# EAGLE board PCB (EAGLE 9.7.0)
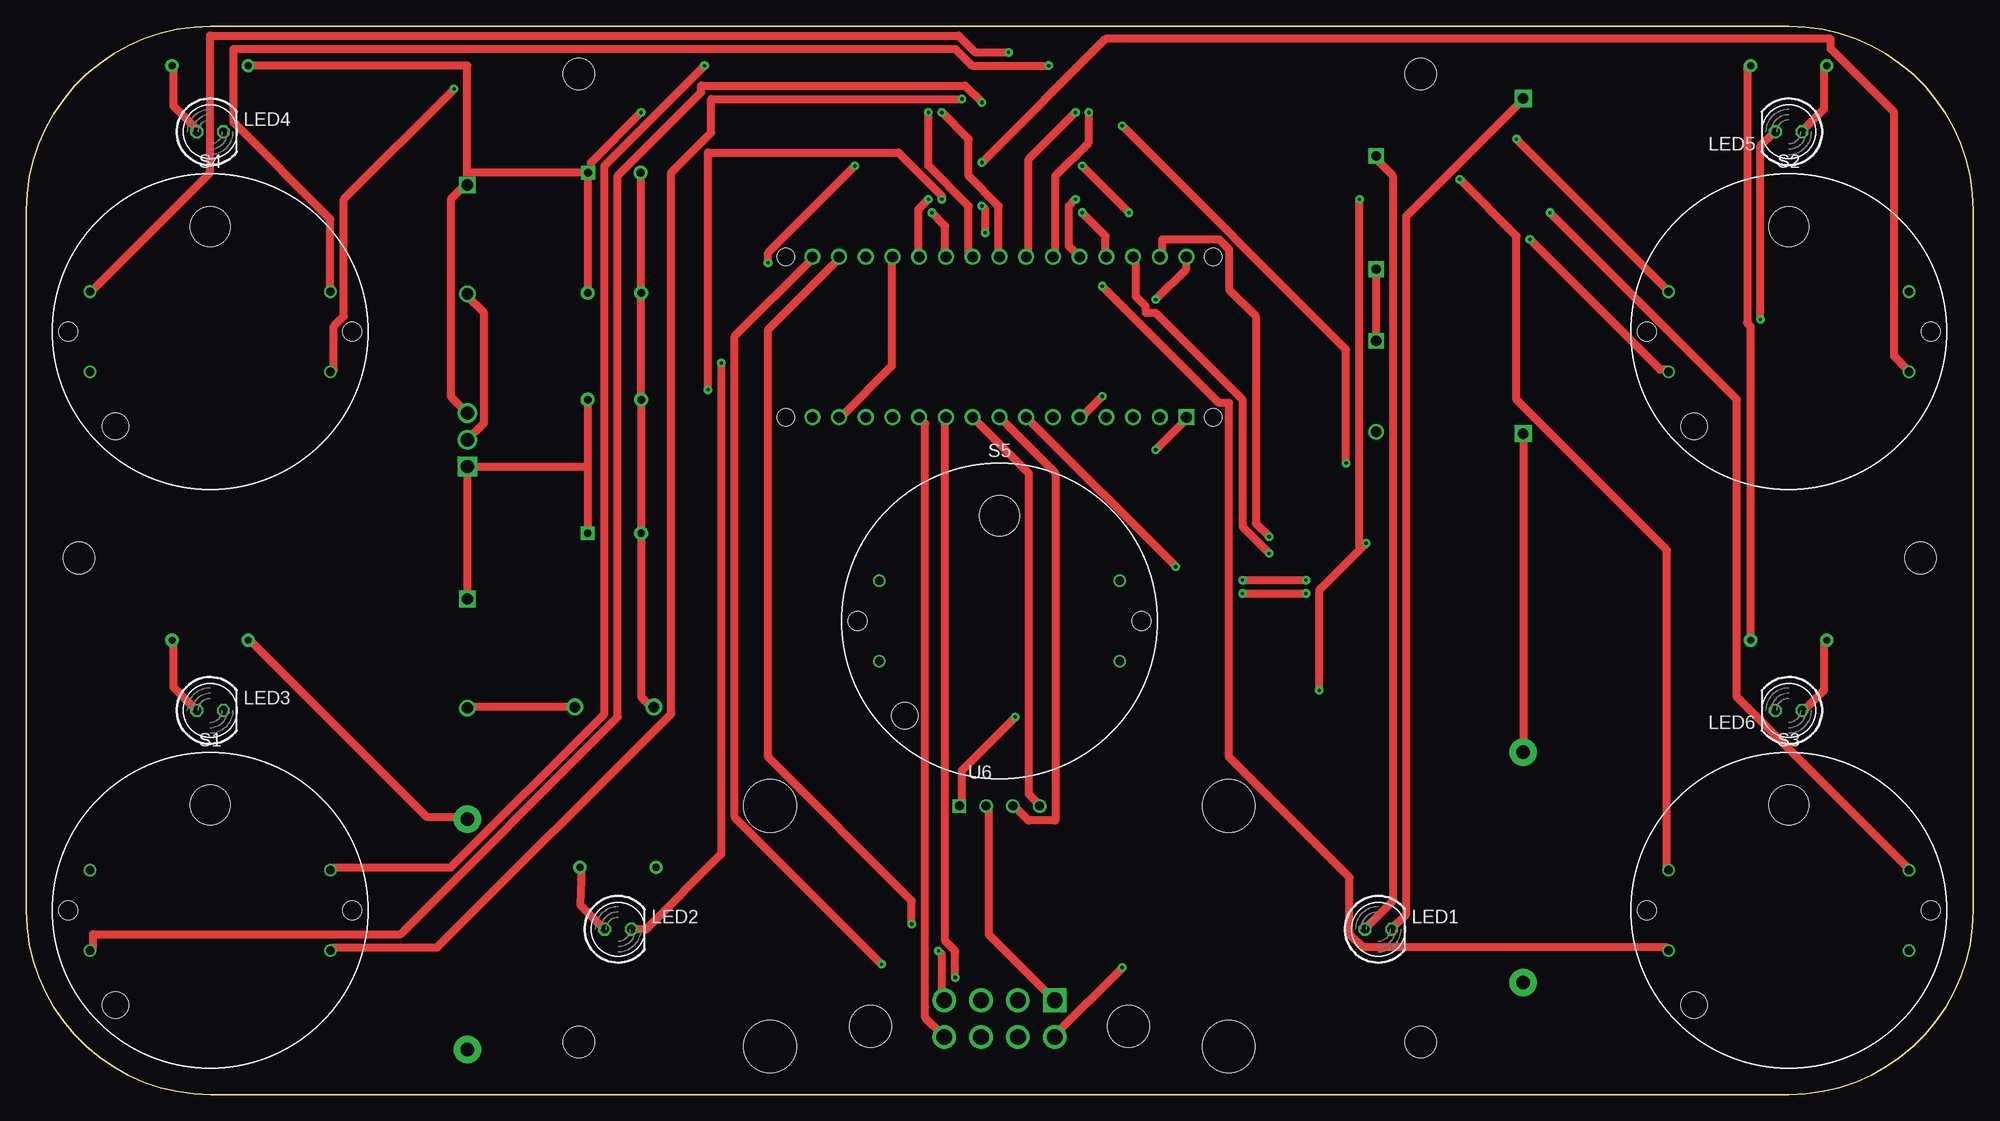
[diagram p0: board, top side]
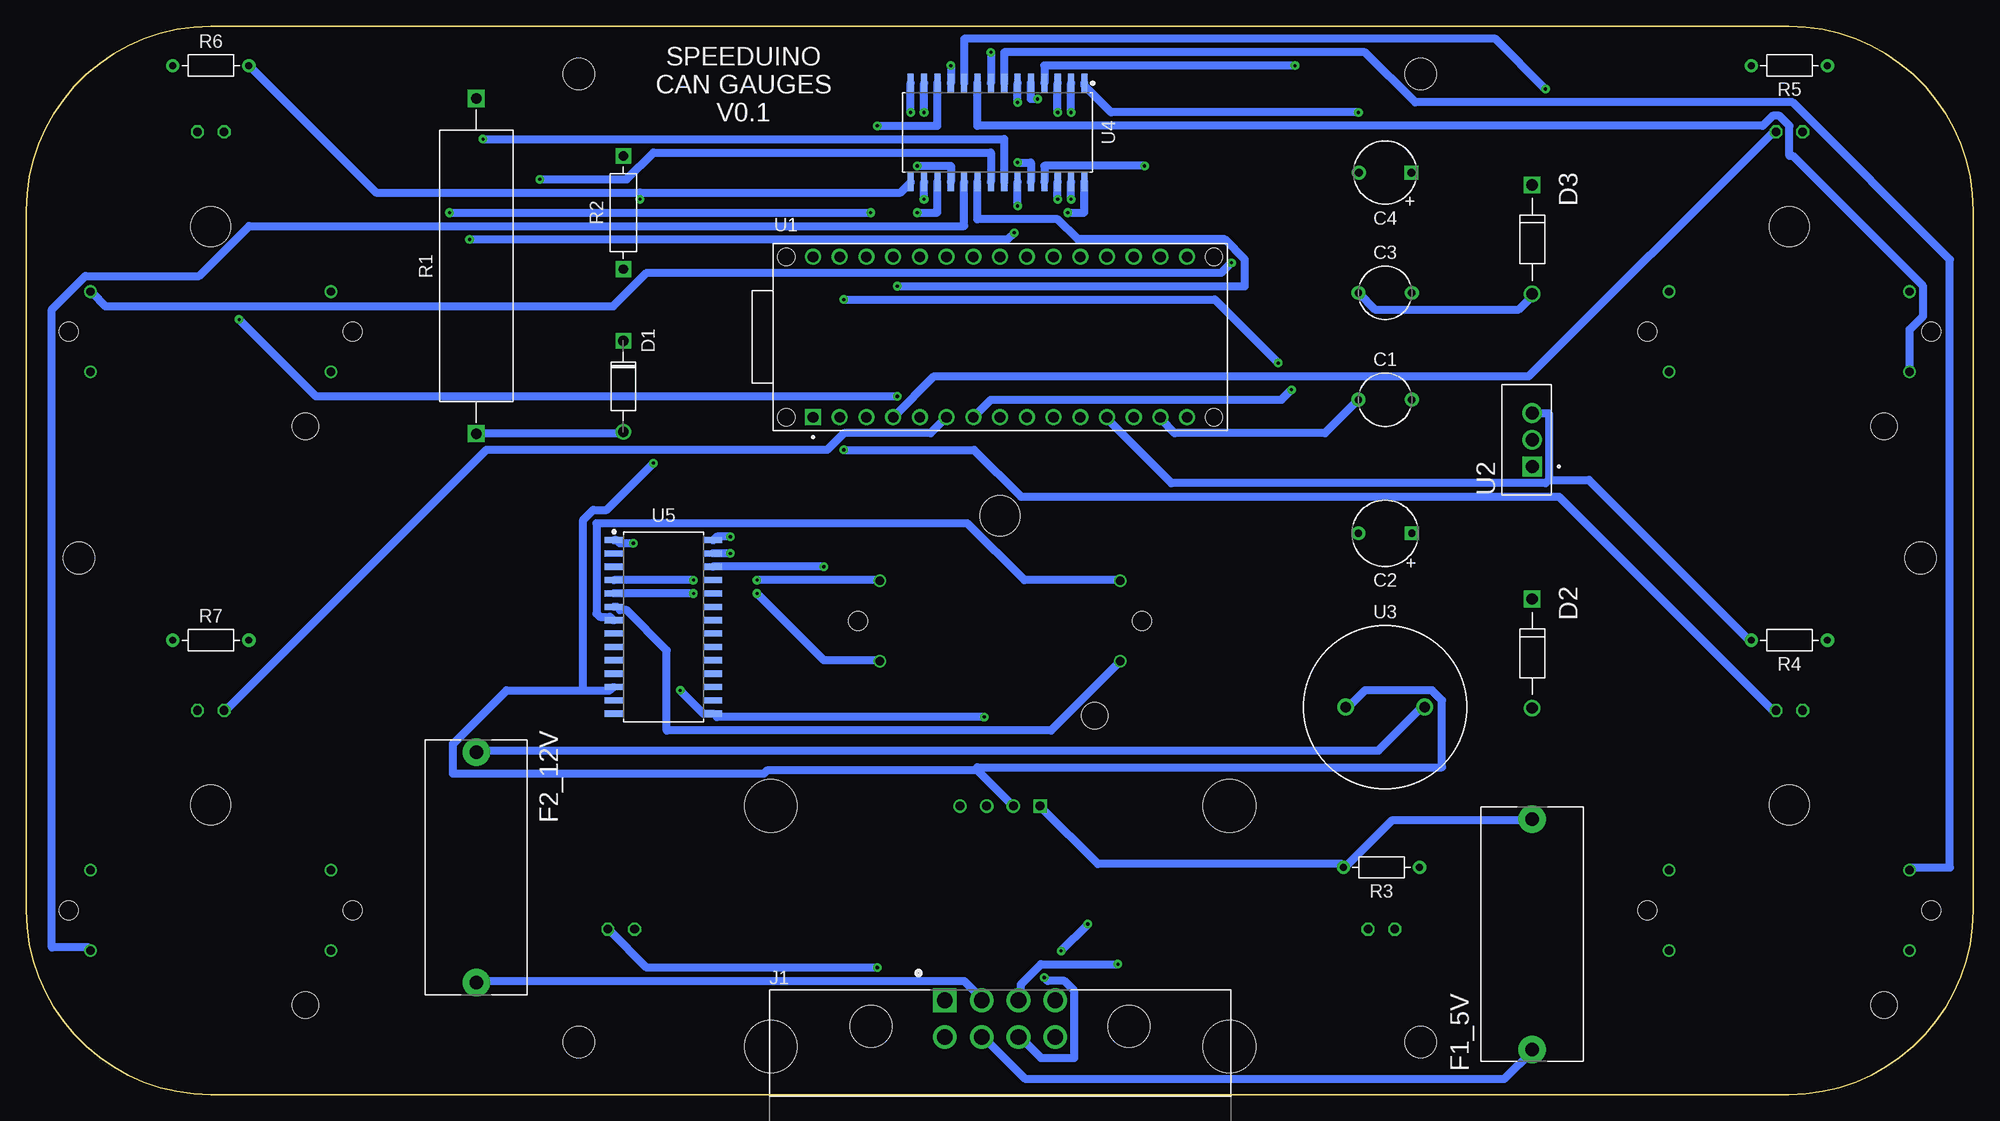
[diagram p1: board, bottom side, seen from below]

Size 185 x 101.53 mm. Coordinates in mm from the lower left corner, seen from the top.
Outline: 167.5,101.53 17.5,101.53 arc90 0,84.03 0,17.5 arc90 17.5,0 167.5,0 arc90 185,17.5 185,84.03 arc90 167.5,101.53
Copper layers (1*16): Top 0.035559375mm / dielectric 1.6mm / Bottom 0.035559375mm
Design rules "jlcpcb2layer *": minimum track width 30mil, minimum drill 12mil, track to track 10mil, track to pad 10mil, pad to pad 5mil, via to via 10mil, smd to smd 5mil, copper to edge 8mil, drill to drill 6mil, minimum pad ring 5mil, minimum via ring 10mil, stop-mask expansion 2.5mil, vias tented up to drill 0mil, thermal gap 10mil
Holes 3 mm at 180,51 5,51 132.5,5 52.5,5 132.5,97 52.5,97

## Footprints (pad centres in the part's own frame; a part is rotated, then mirrored left to right if it is on the bottom)
C322C104K5R5TA = drill 0.71 pad 1.31: 1 -2.54,0; 2 2.54,0
T356G106K035AT = drill 0.7 pad 1.3 square: 1 -2.54,0 | drill 0.7 pad 1.3: 2 2.54,0
TAP476K006CCS = drill 0.75 pad 1.35 square: 1 -2.5,0 | drill 0.75 pad 1.35: 2 2.5,0
DO-41 = drill 1: A 4.325,0 | drill 1 square: C -4.325,0
DIOAD1036W78L520D271 = drill 1.06: A 5.18,0 | drill 1.06 square: K -5.18,0
4527 = drill 1.3 pad 2.6: 1 -10.95,0; 2 10.95,0
MOLEX_34830-0801 = drill 1.5 square: 1 -5.25,2.46 | drill 1.5: 2 -1.75,2.46; 3 1.75,2.46; 4 5.25,2.46; 5 -5.25,-1.04; 6 -1.75,-1.04; 7 1.75,-1.04; 8 5.25,-1.04 | hole 4: -12.25,0; 12.25,0
LED5MM = drill 0.813 octagon: A -1.27,0; K 1.27,0
25J50RE = drill 1.02 pad 1.62 square: 1 -15.93,0; 2 15.93,0
CMF55 = drill 0.89 pad 1.49 square: 1 -5.375,0; 2 5.375,0
RESAD724W46L381D178B = drill 0.66 pad 1.26: 1 -3.62,0; 2 3.62,0
X27.168 = drill 0.8: P$1 -11.43,3.81; P$2 -11.43,-3.81; P$3 11.43,3.81; P$4 11.43,-3.81 | hole 3.8: 0,10 | hole 1.8: -13.5,0; 13.5,0 | hole 2.5: -9,-9
MODULE_ABX00053 = drill 1.016 square: 1 -17.78,-7.62 | drill 1.016: 2 -15.24,-7.62; 3 -12.7,-7.62; 4 -10.16,-7.62; 5 -7.62,-7.62; 6 -5.08,-7.62; 7 -2.54,-7.62; 8 0,-7.62; 9 2.54,-7.62; 10 5.08,-7.62; 11 7.62,-7.62; 12 10.16,-7.62; 13 12.7,-7.62; 14 15.24,-7.62; 15 17.78,-7.62; 16 17.78,7.62; 17 15.24,7.62; 18 12.7,7.62; 19 10.16,7.62; 20 7.62,7.62; 21 5.08,7.62; 22 2.54,7.62; 23 0,7.62; 24 -2.54,7.62; 25 -5.08,7.62; 26 -7.62,7.62; 27 -10.16,7.62; 28 -12.7,7.62; 29 -15.24,7.62; 30 -17.78,7.62 | hole 1.65: -20.32,-7.62; -20.32,7.62; 20.32,7.62; 20.32,-7.62
TO254P1054X470X1955-3 = drill 1.24 square: 1 -2.54,0 | drill 1.24: 2 0,0; 3 2.54,0
ERZV14D220 = drill 1 pad 1.6: 1 -3.75,0; 2 3.75,0
AX1201728SG = smd 1.754 x 0.585: 1 -4.691,8.255; 2 -4.691,6.985; 3 -4.691,5.715; 4 -4.691,4.445; 5 -4.691,3.175; 6 -4.691,1.905; 7 -4.691,0.635; 8 -4.691,-0.635; 9 -4.691,-1.905; 10 -4.691,-3.175; 11 -4.691,-4.445; 12 -4.691,-5.715; 13 -4.691,-6.985; 14 -4.691,-8.255; 15 4.691,-8.255; 16 4.691,-6.985; 17 4.691,-5.715; 18 4.691,-4.445; 19 4.691,-3.175; 20 4.691,-1.905; 21 4.691,-0.635; 22 4.691,0.635; 23 4.691,1.905; 24 4.691,3.175; 25 4.691,4.445; 26 4.691,5.715; 27 4.691,6.985; 28 4.691,8.255
0.56"7-SEGMENTBACKPACK = drill 0.85: P$1 3.81,0; P$2 1.27,0; P$3 -1.27,0 | drill 0.85 square: P$4 -3.81,0 | hole 5: 21.798,0; -21.798,0; -21.798,-22.86; 21.798,-22.86

## Placement (x,y rotation side)
C1  0.1uF 50V  [C322C104K5R5TA]  55.88,66.04 0 bottom
C2  10uF 35V  [T356G106K035AT]  55.88,53.34 180 bottom
C3  0.1uF 50V  [C322C104K5R5TA]  55.88,76.2 0 bottom
C4  47uF 10V  [TAP476K006CCS]  55.88,87.63 180 bottom
D1  [DO-41]  128.27,67.31 270 bottom
D2  1N5818  [DIOAD1036W78L520D271]  41.91,41.91 270 bottom
D3  1N5919  [DIOAD1036W78L520D271]  41.91,81.28 270 bottom
F1_5V  4527  [4527]  41.91,15.24 90 bottom
F2_12V  4527  [4527]  142.24,21.59 270 bottom
J1  34830-0801  [MOLEX_34830-0801]  92.47,6.5 0 bottom
LED1  BATT  [LED5MM]  128.47,15.71 0 top
LED2  RPM  [LED5MM]  56.23,15.71 0 top
LED3  CLT  [LED5MM]  17.47,36.51 0 top
LED4  OIL  [LED5MM]  17.47,91.5 0 top
LED5  AFR  [LED5MM]  167.47,91.5 180 top
LED6  FUEL  [LED5MM]  167.47,36.51 180 top
R1  50Ω 5W  [25J50RE]  142.24,78.74 90 bottom
R2  500Ω 0.5W  [CMF55]  128.27,83.82 90 bottom
R3  220Ω  [RESAD724W46L381D178B]  56.23,21.59 180 bottom
R4  220Ω  [RESAD724W46L381D178B]  17.47,43.18 180 bottom
R5  220Ω  [RESAD724W46L381D178B]  17.47,97.79 180 bottom
R6  220Ω  [RESAD724W46L381D178B]  167.47,97.79 0 bottom
R7  220Ω  [RESAD724W46L381D178B]  167.47,43.18 0 bottom
S1  CLT  [X27.168]  17.47,17.51 0 top
S2  AFR  [X27.168]  167.47,72.5 0 top
S3  FUEL  [X27.168]  167.47,17.51 0 top
S4  OIL  [X27.168]  17.47,72.5 0 top
S5  TACH  [X27.168]  92.47,45.01 0 top
U1  NANO  [MODULE_ABX00053]  92.47,72 0 bottom
U2  LM2940T-5.0  [TO254P1054X470X1955-3]  41.91,62.23 90 bottom
U3  ERZV14D220  [ERZV14D220]  55.88,36.83 0 bottom
U4  AX1201728SG  [AX1201728SG]  92.71,91.44 270 bottom
U5  AX1201728SG  [AX1201728SG]  124.46,44.45 0 bottom
U6  0.56"7-SEGMENTBACKPACK  [0.56"7-SEGMENTBACKPACK]  92.47,27.43 0 top

## Library data of the parts
C1-C4 R1 R2 S1-S5 U3-U6 = GaugesPCB
D1 = Diodes; CREATED_BY: PCBLayout.com; DIGIKEY_PART_NUMBER: 1N4004MSCT-ND; MANUFACTURER: Micro Commercial Co; MPN: 1N4004; PACKAGE: DO-41
D2 D3 = 1N5818; AVAILABILITY: In Stock; DESCRIPTION: Diode Schottky 30 V 1A Through Hole DO-41; MF: STMicroelectronics; MP: 1N5818; PACKAGE: DO-41 STMicroelectronics; PRICE: None; PURCHASE-URL: https://pricing.snapeda.com/search/part/1N5818/?ref=eda
F1_5V F2_12V = Fuse Holder; CREATED_BY: PCBLayout.com; DIGIKEY_PN: 36-4527-ND; MANUFACTURER: Keystone Electronics; MPN: 4527
J1 = 34830-0801; AVAILABILITY: In Stock; DESCRIPTION: Connector Header Through Hole, Right Angle 8 position 0.138 (3.50mm); MF: Molex; MP: 34830-0801; PACKAGE: None; PRICE: None; PURCHASE-URL: https://pricing.snapeda.com/search/part/34830-0801/?ref=eda
LED1-LED6 = led
R3-R7 = Resistor; CATEGORY: Resistor; SUB-CATEGORY: Fixed
U1 = Arduino Nano; AVAILABILITY: In Stock; DESCRIPTION: NINA-W102, RP2040 Arduino Nano RP2040 Connect with Headers series ARM® Cortex®-M0+ MCU 32-Bit Embedded Evaluation Board; MF: Arduino; MP: ABX00053; PACKAGE: None; PRICE: None; PURCHASE-URL: https://pricing.snapeda.com/search/part/ABX00053/?ref=eda
U2 = LM2940T-5.0; AVAILABILITY: In Stock; DESCRIPTION: 1-A, 26-V, high-PSRR, low-dropout voltage regulator 3-TO-220 -40 to 125; MF: Texas Instruments; MP: LM2940T-5.0; PACKAGE: TO-220-3 Texas Instruments; PRICE: None; PURCHASE-URL: https://pricing.snapeda.com/search/part/LM2940T-5.0/?ref=eda

## Nets
+3V3: U1.2
+5V: C3.2 C4.1 D3.K F1_5V.2 R3.2 R4.2 R5.2 R6.2 R7.2 U1.12 U2.3 U4.1 U4.15 U5.1 U5.15 U6.P$4
+12V: D1.A D2.A F2_12V.1 R1.1 U3.2
GND: C1.1 C2.2 C3.1 C4.2 D3.A J1.1 U1.14 U1.19 U2.2 U3.1 U4.12 U5.12 U6.P$3
N$1: J1.3 U1.16
N$2: J1.4 U1.17
N$3: J1.7 U1.10
N$4: J1.8 U1.11
N$5: D1.C R2.1
N$6: LED1.A R2.2
N$7: J1.5 LED1.K R1.2
N$8: C1.2 C2.1 D2.K U2.1
N$9: F1_5V.1 J1.6
N$10: F2_12V.2 J1.2
N$11: U1.7 U4.26 U5.26
N$12: U1.20 U4.27
N$13: U1.21 U4.28
N$14: U1.22 U4.2
N$15: U1.23 U4.3
N$16: U1.24 U4.13
N$17: U1.25 U4.14
N$18: U1.26 U4.16
N$19: U1.27 U4.17
N$20: U1.28 U5.27
N$21: U1.29 U5.28
N$22: LED2.A R3.1
N$23: LED3.A R4.1
N$24: LED4.A R5.1
N$25: LED5.A R6.1
N$26: LED6.A R7.1
N$27: LED2.K U1.30
N$28: LED3.K U1.1
N$29: LED4.K U1.4
N$30: LED5.K U1.5
N$31: LED6.K U1.6
N$32: S1.P$1 U4.7
N$33: S1.P$2 U4.6
N$34: S1.P$3 U4.4
N$35: S1.P$4 U4.5
N$36: S5.P$1 U5.7
N$37: S5.P$2 U5.6
N$38: S5.P$3 U5.4
N$39: S5.P$4 U5.5
N$40: S4.P$1 U4.8
N$41: S4.P$2 U4.9
N$42: S4.P$3 U4.11
N$43: S4.P$4 U4.10
N$44: S3.P$3 U4.18
N$45: S3.P$4 U4.19
N$46: S3.P$2 U4.20
N$47: S3.P$1 U4.21
N$48: S2.P$1 U4.22
N$49: S2.P$2 U4.23
N$50: S2.P$4 U4.24
N$51: S2.P$3 U4.25
N$52: U1.8 U6.P$2
N$53: U1.9 U6.P$1
VIN: U1.15

## Tracks (layer width: path | path; a pad name or v marks a point on that pad's centre or on a via)
+5V  (via drill 0.3)
  Top 0.762: R7.2 163.83,43.18 163.83,73.03 163.51,73.34 163.51,97.47 163.83,97.79 R6.2 | v93.98,35.88 88.9,30.8 88.9,27.62 U6.P$4 | 126.84,51.91 122.87,47.94 v122.87,38.42 | 126.84,51.91 v127.32,52.39 | R4.2 21.27,43.18 38.1,26.35 41.91,26.35 F1_5V.2 | R5.2 41.91,97.79 41.91,87.63 | 41.91,87.63 D3.K 41.59,86.36 40.32,85.09 40.32,66.36 U2.3 | v58.42,93.34 53.66,88.58 53.66,87.63 C4.1 | C3.2 53.34,87.31 C4.1 | C4.1 41.91,87.63 | v126.68,85.09 126.68,52.07 126.84,51.91
  Bottom 0.762: 126.68,85.72 151.76,85.72 163.83,97.79 R6.2 | 126.68,85.72 101.92,85.72 100.97,86.68 U4.15 | v93.98,35.88 119.38,35.88 119.7,36.2 U5.15 120.65,36.2 v122.87,38.42 | v127.32,52.39 128.59,52.39 128.91,52.7 U5.1 | F1_5V.2 41.91,26.04 55.24,26.04 59.69,21.59 R3.2 60.01,21.91 83.19,21.91 88.58,27.3 U6.P$4 | 40.32,58.42 40.64,58.1 76.2,58.1 82.23,64.14 U1.12 | 40.32,58.42 40.32,64.77 U2.3 | v58.42,93.34 81.92,93.34 84.45,95.89 U4.1 | 40.32,58.42 36.51,58.42 21.27,43.18 R4.2 | v126.68,85.09 126.68,85.72
+12V
  Top 0.762: U3.2 41.91,36.83 D2.A | R1.1 F2_12V.1
  Bottom 0.762: D1.A 128.27,62.87 142.24,62.87 R1.1 | U3.2 52.39,36.83 56.52,32.7 142.24,32.7 F2_12V.1
GND  (via drill 0.3)
  Top 0.762: U1.14 77.47,64.45 82.23,69.22 82.23,79.38 U1.19 | U2.2 43.5,63.82 43.5,74.3 41.91,75.88 D3.A | C4.2 58.42,87.63 C3.1 C1.1 C2.2 58.42,37.78 59.37,36.83 U3.1 | v104.14,92.08 125.41,70.8 v125.41,60.01 | J1.1 91.44,15.24 91.44,27.3 U6.P$3
  Bottom 0.762: C3.1 56.83,74.61 43.18,74.61 41.91,75.88 D3.A | C1.1 61.59,62.87 75.88,62.87 77.15,64.14 U1.14 | 132.08,38.42 139.38,38.42 144.46,33.34 144.46,30.48 114.94,30.48 114.62,30.8 94.61,30.8 | 132.08,38.42 129.54,38.42 129.22,38.73 U5.12 | 94.61,30.8 91.44,27.62 U6.P$3 | U4.12 98.42,92.08 v104.14,92.08 | v125.41,60.01 129.86,55.56 131.13,55.56 132.08,54.61 132.08,38.42 | U3.1 59.37,36.83 57.78,38.42 51.44,38.42 50.48,37.47 50.48,31.11 94.61,31.11 94.61,30.8
N$1  (via drill 0.3)
  Top 0.762: v81.28,12.38 67.31,26.35 67.31,72.07 74.61,79.38 U1.16
  Bottom 0.762: v81.28,12.38 88.58,12.38 90.49,10.48 90.49,9.21 J1.3
N$2  (via drill 0.3)
  Top 0.762: v84.14,16.19 84.14,18.41 70.48,32.07 70.48,72.71 77.15,79.38 U1.17 | v86.68,13.65 87,13.34 87,9.21 J1.4
  Bottom 0.762: v86.68,13.65 v84.14,16.19
N$3  (via drill 0.3)
  Top 0.762: v88.27,11.11 88.27,13.65 87.31,14.61 87.31,64.14 U1.10
  Bottom 0.762: v88.27,11.11 87.95,10.79 86.36,10.79 85.41,9.84 85.41,3.49 88.58,3.49 90.49,5.4 J1.7
N$4
  Top 0.762: U1.11 85.09,64.14 85.41,63.82 85.41,7.3 87,5.71 J1.8
N$5
  Top 0.762: D1.C R2.1
N$6
  Top 0.762: LED1.A 127.32,15.88 129.86,18.41 129.86,87.31 128.27,88.9 R2.2
N$7  (via drill 0.3)
  Top 0.762: v104.14,12.06 97.79,5.71 J1.5 | R1.2 142.24,94.61 131.13,83.5 131.13,17.14 129.86,15.88 LED1.K
  Bottom 0.762: v104.14,12.06 126.05,12.06 129.54,15.56 LED1.K
N$8
  Top 0.762: C1.2 53.34,59.69 | 53.34,59.69 C2.1 | D2.K U2.1 53.34,59.69
N$9
  Bottom 0.762: J1.6 93.98,5.4 90.04,1.46 44.58,1.46 41.91,4.13 F1_5V.1
N$10
  Bottom 0.762: J1.2 94.3,9.21 95.89,10.79 142.24,10.79 F2_12V.2
N$11  (via drill 0.3)
  Top 0.762: v109.22,50.16 95.25,64.14 U1.7 | v87,85.09 87,85.41 82.87,89.53 64.77,89.53 v64.77,66.99
  Bottom 0.762: v109.22,50.16 U5.26 | v87,85.09 U4.26 | v64.77,66.99 65.72,66.04 93.34,66.04 94.93,64.45 U1.7
N$12  (via drill 0.3)
  Top 0.762: v85.72,85.09 84.77,84.14 84.77,79.69 U1.20
  Bottom 0.762: v85.72,85.09 U4.27
N$13  (via drill 0.3)
  Top 0.762: v86.04,83.82 87.31,82.55 87.31,79.69 U1.21
  Bottom 0.762: U4.28 84.45,83.82 v86.04,83.82
N$14  (via drill 0.3)
  Top 0.762: v85.72,93.34 85.72,88.27 89.53,84.45 89.53,80.01 89.85,79.69 U1.22
  Bottom 0.762: v85.72,93.34 U4.2
N$15  (via drill 0.3)
  Top 0.762: v87,93.34 89.53,90.81 89.53,87.31 92.39,84.45 92.39,79.69 U1.23
  Bottom 0.762: v87,93.34 U4.3
N$16  (via drill 0.3)
  Top 0.762: v99.69,93.34 95.25,88.9 95.25,79.69 U1.24
  Bottom 0.762: v99.69,93.34 U4.13
N$17  (via drill 0.3)
  Top 0.762: v100.97,93.34 100.97,90.49 97.79,87.31 97.79,79.69 U1.25
  Bottom 0.762: v100.97,93.34 U4.14
N$18  (via drill 0.3)
  Top 0.762: v99.69,85.09 99.06,84.45 99.06,80.64 100.01,79.69 U1.26
  Bottom 0.762: v99.69,85.09 U4.16
N$19  (via drill 0.3)
  Top 0.762: v100.33,83.82 102.55,81.6 102.55,79.69 U1.27
  Bottom 0.762: U4.17 98.42,83.82 v100.33,83.82
N$20  (via drill 0.3)
  Top 0.762: v118.11,51.44 115.57,53.98 115.57,66.04 107.31,74.3 106.36,74.3 106.36,74.93 105.41,75.88 105.41,79.38 U1.28
  Bottom 0.762: v118.11,51.44 U5.27
N$21  (via drill 0.3)
  Top 0.762: v118.11,53.02 116.84,54.29 116.84,73.98 114.3,76.52 114.3,80.33 113.35,81.28 107.95,81.28 107.95,79.69 U1.29
  Bottom 0.762: v118.11,53.02 119.38,53.02 119.7,52.7 U5.28
N$22
  Top 0.762: LED2.A 52.63,18.04 52.7,20.41 52.7,21.59 R3.1
N$23
  Top 0.762: LED3.A 13.97,38.73 13.97,43.18 R4.1
N$24
  Top 0.762: LED4.A 16.19,91.76 13.97,93.98 13.97,97.79 R5.1
N$25
  Top 0.762: LED5.A 168.91,91.76 170.81,93.66 170.81,97.79 R6.1
N$26
  Top 0.762: LED6.A 168.91,36.51 170.81,38.42 170.81,43.18 R7.1
N$27  (via drill 0.3)
  Top 0.762: v66.04,69.53 66.04,22.86 58.8,15.62 58.78,15.71 LED2.K | v107.31,75.56 110.17,78.42 110.17,79.38 U1.30
  Bottom 0.762: v66.04,69.53 72.07,75.56 v107.31,75.56
N$28  (via drill 0.3)
  Top 0.762: v107.31,61.28 110.17,64.14 U1.1
  Bottom 0.762: v107.31,61.28 94.93,61.28 90.49,56.83 39.37,56.83 19.05,36.51 LED3.K
N$29
  Bottom 0.762: LED4.K 19.05,91.44 42.23,68.26 98.74,68.26 102.55,64.45 U1.4
N$30  (via drill 0.3)
  Top 0.762: v164.78,73.66 164.78,90.17 166.05,91.44 LED5.K | v102.23,66.36 100.33,64.45 U1.5
  Bottom 0.762: v164.78,73.66 157.48,66.36 v102.23,66.36
N$31
  Bottom 0.762: LED6.K 166.05,36.51 141.29,61.28 108.9,61.28 107.31,62.87 99.06,62.87 97.79,64.14 U1.6
N$32
  Bottom 0.762: U4.7 92.08,99.06 57.78,99.06 53.02,94.3 17.14,94.3 2.22,79.38 2.22,21.59 6.03,21.59 S1.P$1
N$33  (via drill 0.3)
  Top 0.762: v90.81,94.3 89.22,95.89 64.14,95.89 64.14,95.25 56.2,87.31 56.2,35.88 35.56,15.24 6.35,15.24 6.35,13.97 S1.P$2
  Bottom 0.762: v90.81,94.3 U4.6
N$34  (via drill 0.3)
  Top 0.762: v64.45,97.79 54.93,88.27 54.93,36.2 40.32,21.59 29.21,21.59 S1.P$3
  Bottom 0.762: U4.4 88.27,97.79 v64.45,97.79
N$35  (via drill 0.3)
  Top 0.762: v88.9,94.61 65.09,94.61 65.09,91.44 61.28,87.63 61.28,36.2 39.05,13.97 29.21,13.97 S1.P$4
  Bottom 0.762: U4.5 89.53,94.61 v88.9,94.61
N$36
  Bottom 0.762: U5.7 129.22,45.09 129.54,45.4 130.49,45.4 130.81,45.72 130.81,54.29 95.57,54.29 90.17,48.9 81.28,48.9 S5.P$1
N$37
  Bottom 0.762: U5.6 128.91,46.35 128.59,46.04 127.95,46.04 124.14,42.23 124.14,34.61 87.63,34.61 81.28,40.96 S5.P$2
N$38  (via drill 0.3)
  Top 0.762: v115.57,48.9 v121.6,48.9
  Bottom 0.762: v121.6,48.9 U5.4 | v115.57,48.9 104.14,48.9 S5.P$3
N$39  (via drill 0.3)
  Top 0.762: v115.57,47.62 v121.6,47.62
  Bottom 0.762: v121.6,47.62 U5.5 | v115.57,47.62 109.22,41.27 104.14,41.27 S5.P$4
N$40  (via drill 0.3)
  Top 0.762: v93.34,99.06 90.17,99.06 88.58,100.65 17.46,100.65 17.46,87.63 6.35,76.52 S4.P$1
  Bottom 0.762: v93.34,99.06 U4.8
N$41
  Bottom 0.762: U4.9 94.61,92.08 20,92.08 19.05,93.03 18.41,93.03 17.46,92.08 17.46,89.22 17.14,89.22 4.76,76.83 4.76,73.98 6.03,72.71 6.03,68.9 S4.P$2
N$42  (via drill 0.3)
  Top 0.762: v97.16,97.79 89.85,97.79 88.27,99.38 19.68,99.38 19.68,92.39 28.89,83.19 28.89,76.52 S4.P$3
  Bottom 0.762: v97.16,97.79 U4.11
N$43  (via drill 0.3)
  Top 0.762: v40.64,95.57 30.16,85.09 30.16,73.98 29.21,73.03 29.21,68.9 S4.P$4
  Bottom 0.762: U4.10 95.89,100.33 45.4,100.33 v40.64,95.57
N$44  (via drill 0.3)
  Top 0.762: v104.78,83.82 v100.33,88.27 | v144.78,83.82 162.56,66.04 162.56,37.78 178.75,21.59 S3.P$3
  Bottom 0.762: U4.18 97.16,88.27 v100.33,88.27 | v144.78,83.82 v104.78,83.82
N$45
  Bottom 0.762: U4.19 95.89,82.55 163.83,82.55 168.59,77.79 179.39,77.79 182.56,74.61 182.56,13.97 179.07,13.97 S3.P$4
N$46  (via drill 0.3)
  Top 0.762: v102.23,76.83 113.35,65.72 114.3,65.72 114.3,32.07 125.73,20.64 125.73,15.24 127,13.97 155.89,13.97 S3.P$2
  Bottom 0.762: U4.20 94.61,83.19 87,83.19 85.09,81.28 71.12,81.28 69.22,79.38 69.22,76.83 v102.23,76.83
N$47  (via drill 0.3)
  Top 0.762: v136.21,87 141.6,81.6 141.6,66.04 155.89,51.75 155.89,21.59 S3.P$1
  Bottom 0.762: U4.21 93.34,89.53 125.41,89.53 127.95,87 v136.21,87
N$48  (via drill 0.3)
  Top 0.762: v141.6,90.81 155.89,76.52 S2.P$1
  Bottom 0.762: U4.22 92.08,90.81 v141.6,90.81
N$49  (via drill 0.3)
  Top 0.762: v90.81,84.45 91.12,84.14 v91.12,81.92 | v142.88,81.28 155.26,68.9 155.89,68.9 S2.P$2
  Bottom 0.762: v90.81,84.45 U4.23 | v91.12,81.92 91.76,81.28 v142.88,81.28
N$50  (via drill 0.3)
  Top 0.762: v90.81,88.58 102.55,100.33 171.45,100.33 171.45,99.38 177.48,93.34 177.48,70.17 178.75,68.9 S2.P$4
  Bottom 0.762: U4.24 89.53,88.58 v90.81,88.58
N$51  (via drill 0.3)
  Top 0.762: v78.74,88.27 70.48,80.01 v70.48,79.06
  Bottom 0.762: U4.25 88.27,88.27 v78.74,88.27 | v70.48,79.06 71.44,78.11 126.05,78.11 129.22,74.93 177.48,74.93 178.75,76.2 S2.P$3
N$52
  Top 0.762: U6.P$2 93.98,27.3 95.25,26.04 97.79,26.04 97.79,59.05 92.71,64.14 U1.8
N$53
  Top 0.762: U6.P$1 96.2,27.62 95.25,28.57 95.25,59.05 90.17,64.14 U1.9

## Text on the board
bPlace: SPEEDUINO / CAN GAUGES / V0.1